# Altium PCB PCB_Final.PcbDoc
Units mm, origin at the board's own origin, x right, y up, seen from the top; angles counter-clockwise.
Board outline 62.68 x 60.32 mm, 2 copper layers (Top Layer, Bottom Layer); 43 components, 23 nets, 164 pads, 0 vias.
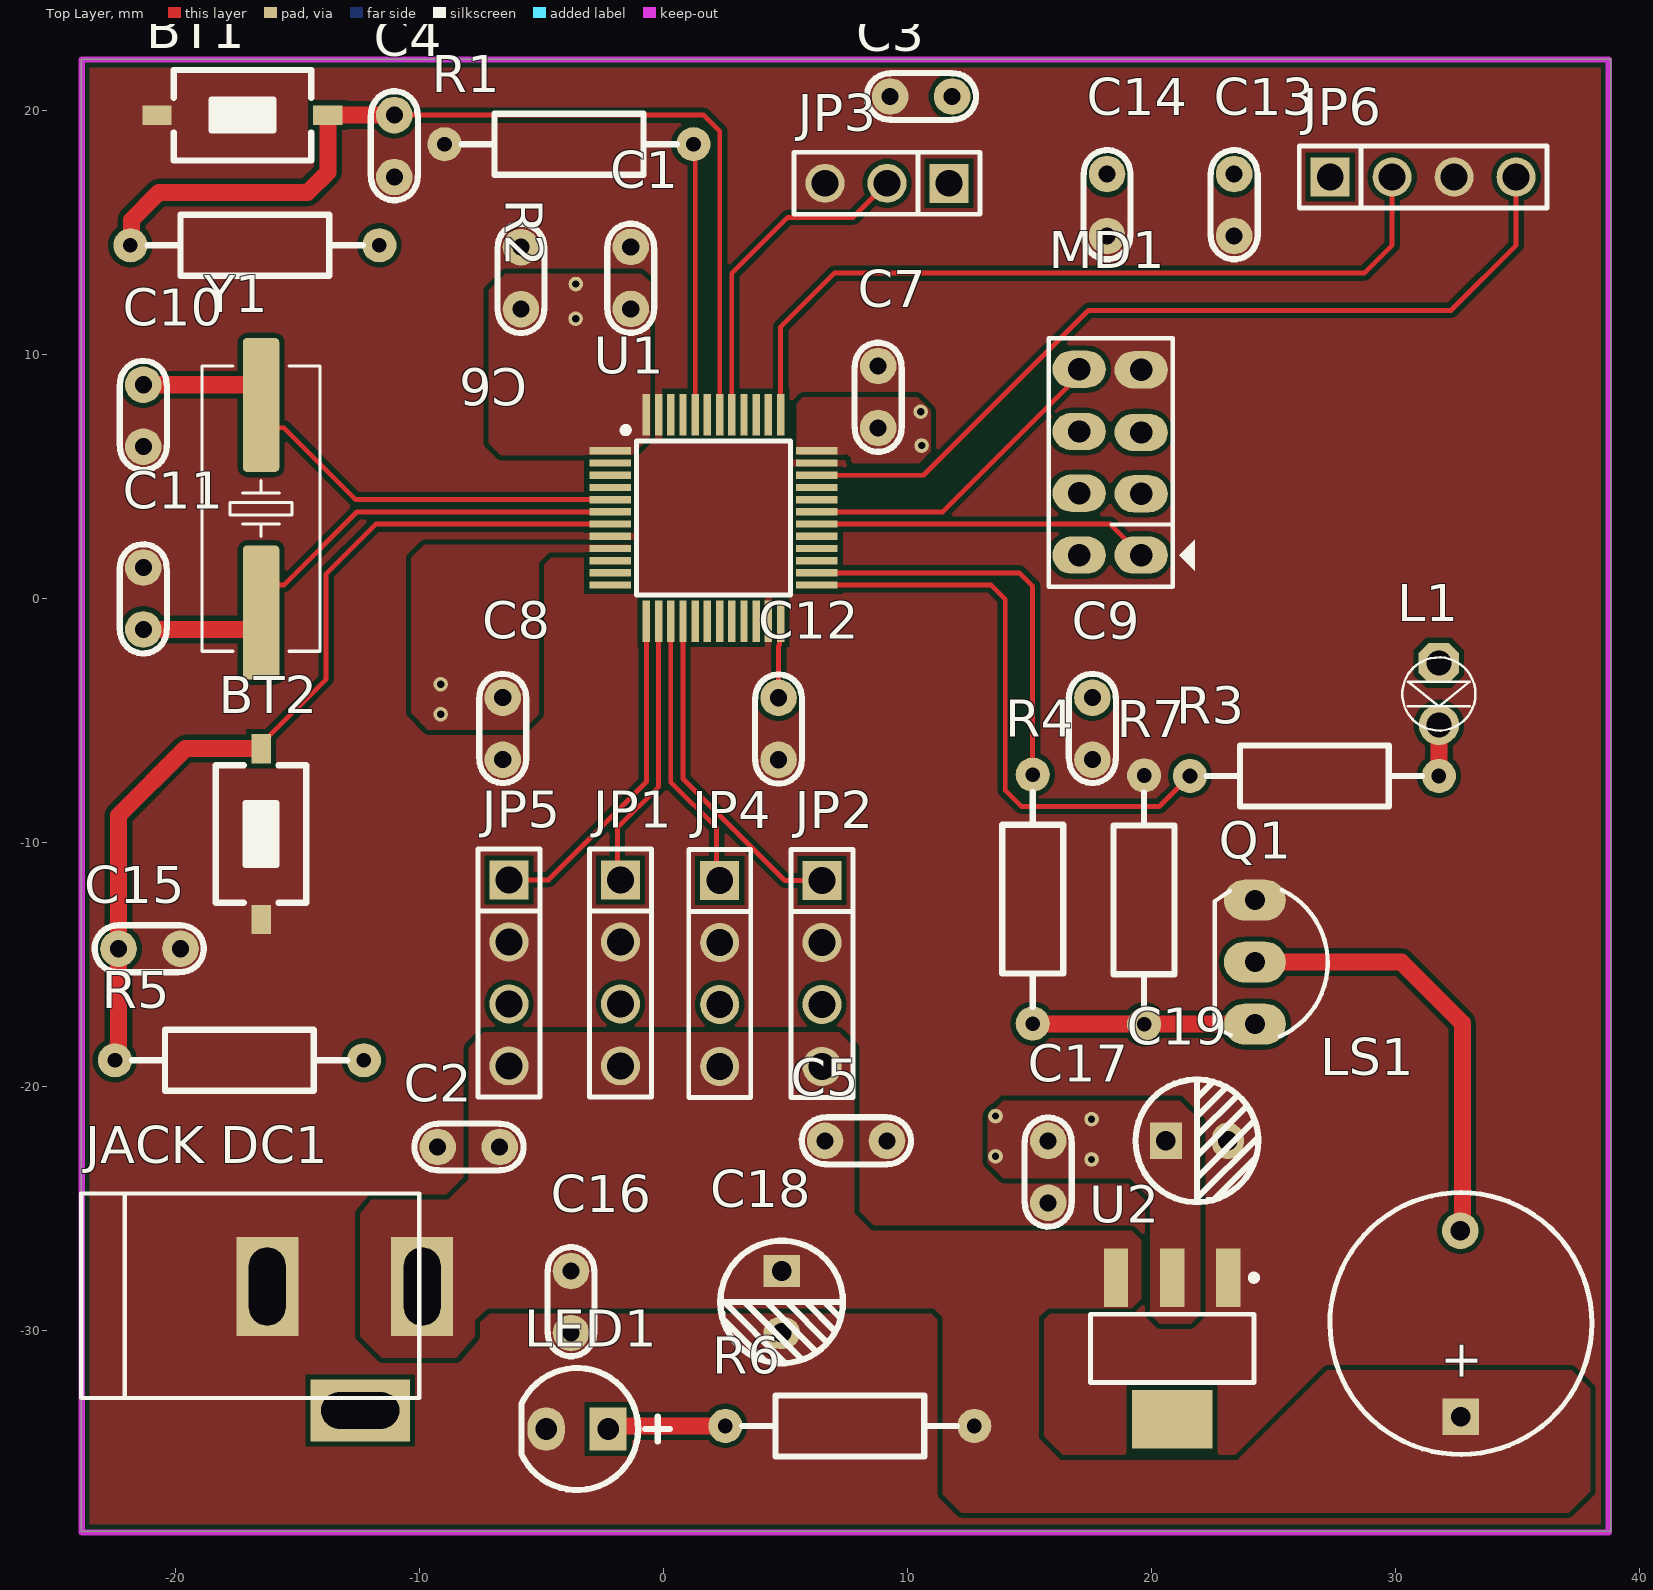
[diagram p0: Top Layer view]
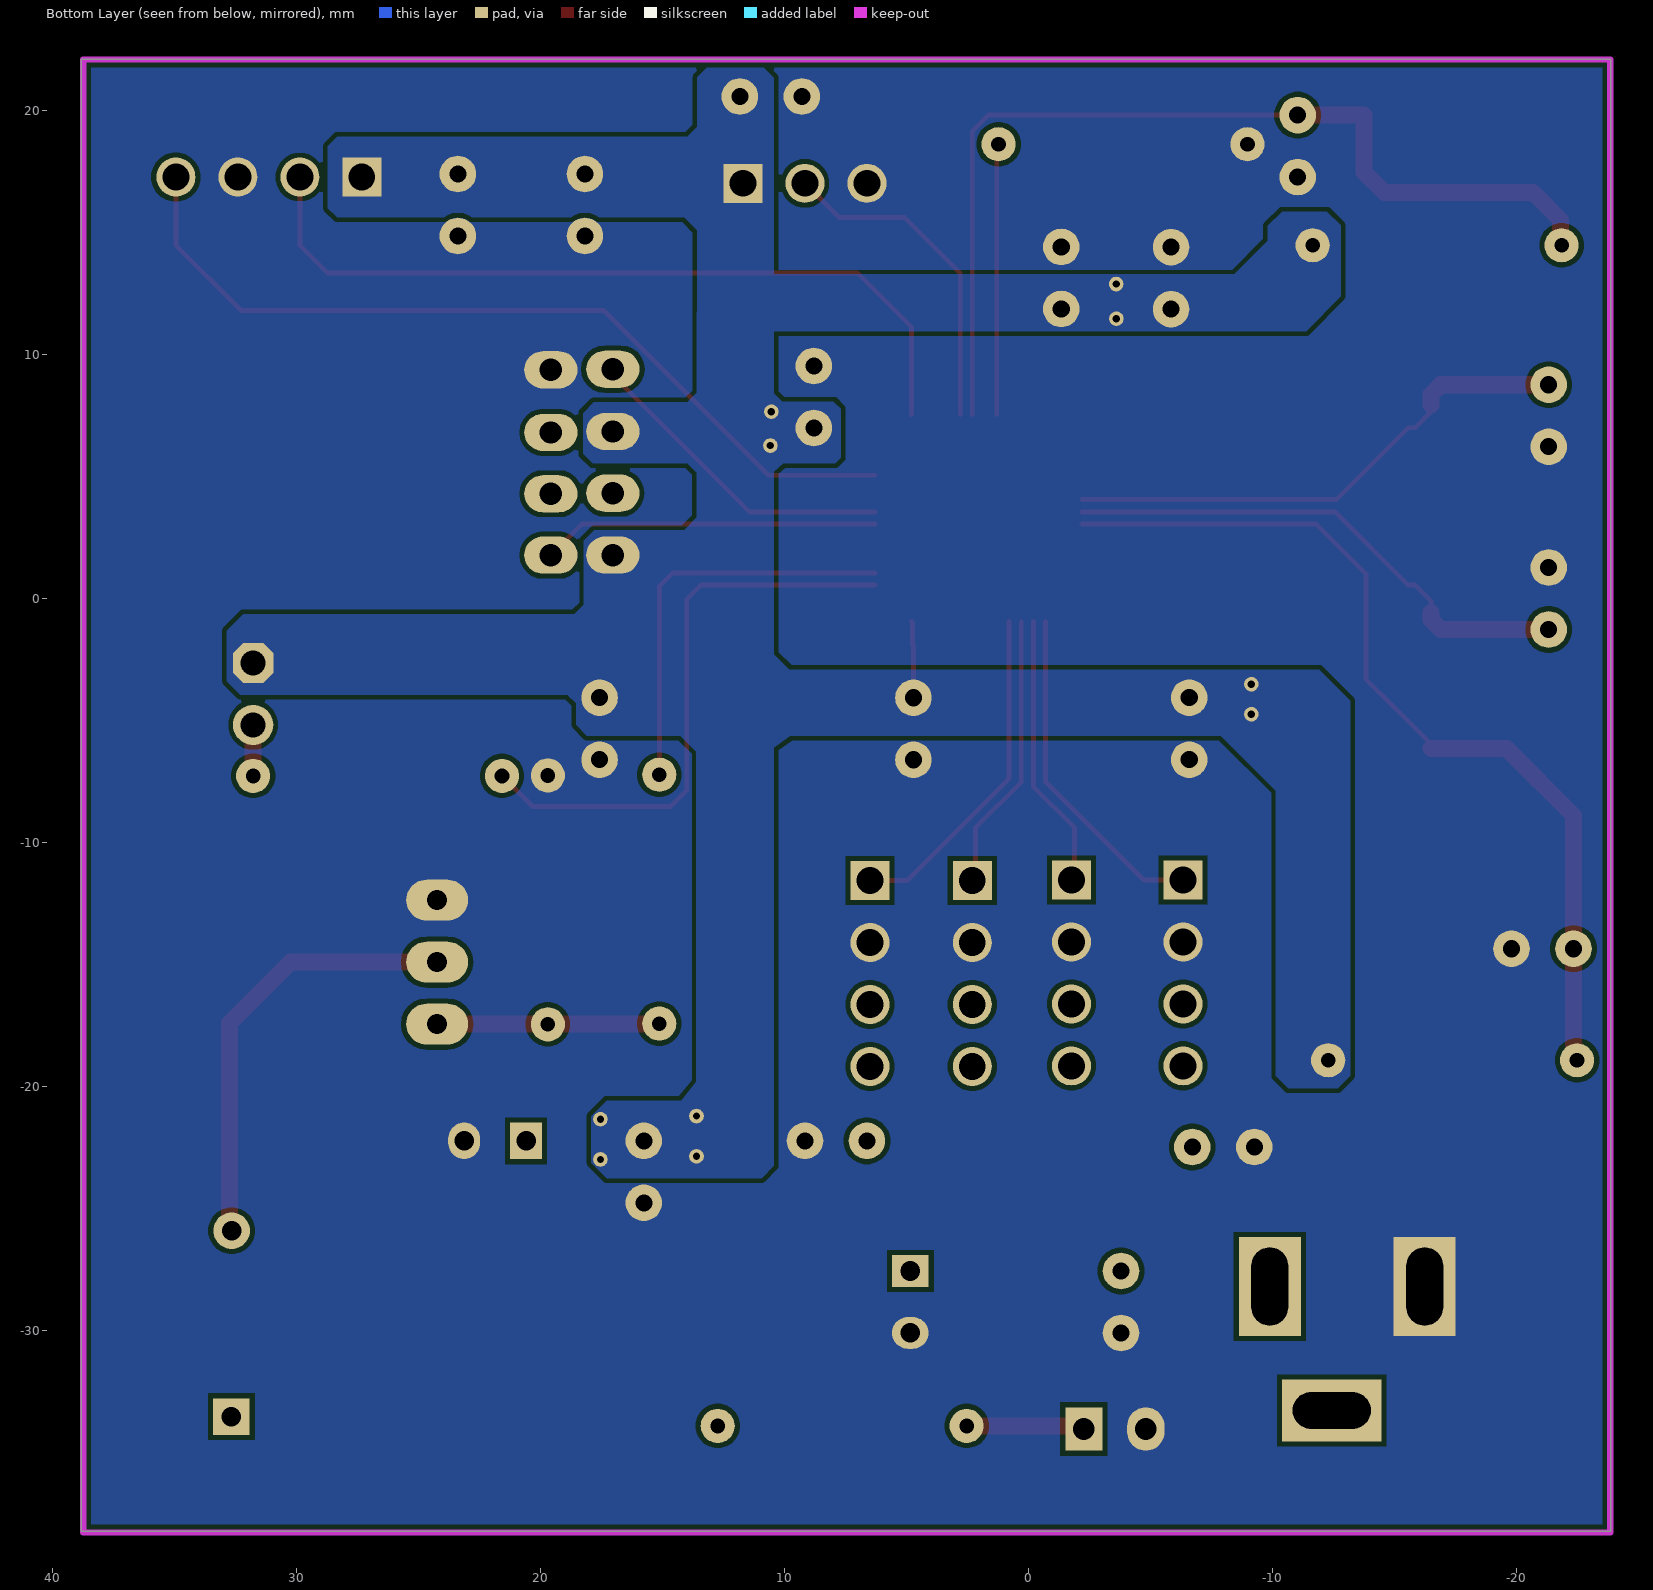
[diagram p1: Bottom Layer view, seen from below]
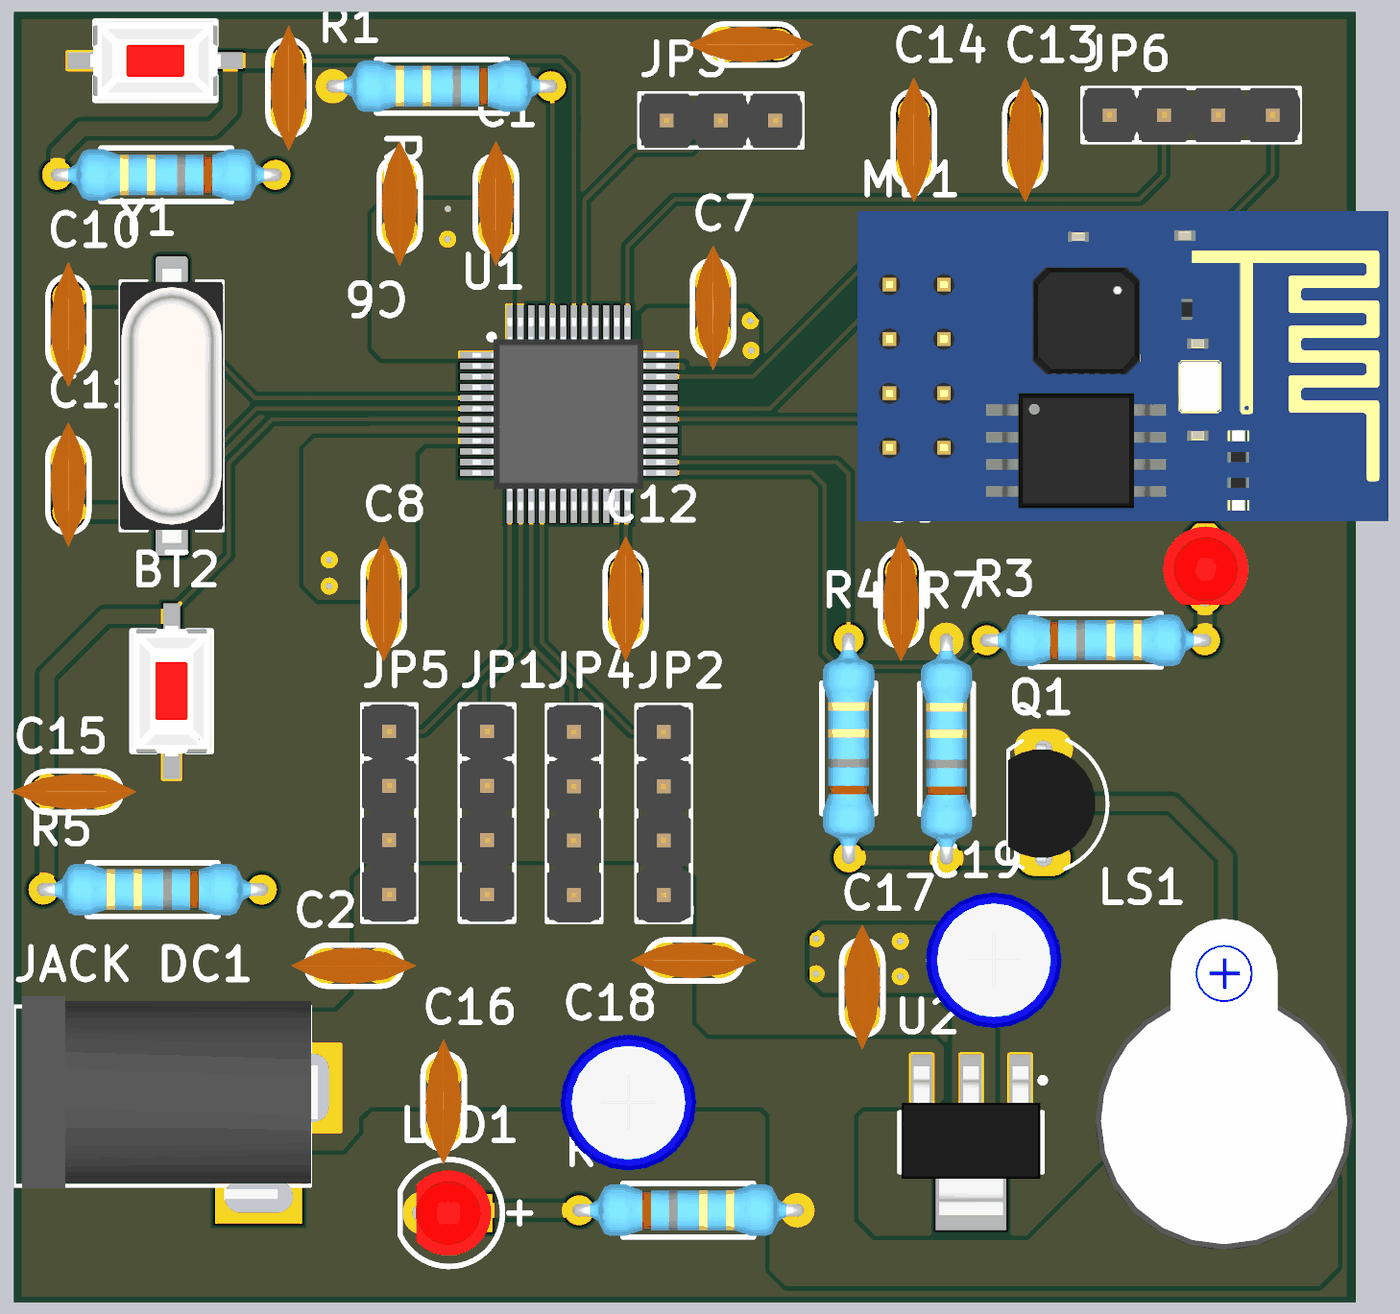
[diagram p2: 3D render of the assembled board from above, using the file's embedded part models]

## Layer stack, top to bottom
Top Solder: solder mask 0.0102, Solder Resist, Dk 3.5
Top Layer: signal copper 0.0356
Dielectric 1: dielectric 0.32, FR-4, Dk 4.8
Bottom Layer: signal copper 0.0356
Bottom Solder: solder mask 0.0102, Solder Resist, Dk 3.5

## Board outline
-23.876,-38.227 38.8,-38.227 38.8,22.098 -23.876,22.098

## Design rules (kind name [scope] priority, off if disabled: settings)
Clearance [All] p1: gap=0.2 ignorepadtopadclearanceinfootprint=FALSE
DiffPairsRouting [All] p1: maxlimit=0.254 minlimit=0.254 mostfreqgap=0.254 toplayer_minwidth=0.3 toplayer_maxwidth=0.5 toplayer_prefwidth=0.354 bottomlayer_minwidth=0.254 bottomlayer_maxwidth=0.5 bottomlayer_prefwidth=0.354 maxuncoupledlength=12.7
HoleSize [All] p1: absolutevalues=TRUE maxlimit=10 minlimit=0.3 maxpercent=80.000 minpercent=20.000
HoleToHoleClearance [All] p1: gap=0 allowstackedmicrovias=TRUE
MinimumSolderMaskSliver [All] p1: minsoldermaskwidth=0
PolygonConnect [All] p1: connectstyle=Direct reliefconductorwidth=0.254 reliefentries=4 polygonreliefangle="90 Angle" airgapwidth=0.254
RoutingVias [All] p1: holewidth=0.3 width=0.6 viastyle="Through Hole" minholewidth=0.3 minwidth=0.2 maxholewidth=0.3 maxwidth=0.3
SilkToSilkClearance [All] p1: silktosilkclearance=0
SilkToSolderMaskClearance [IsPad] p1: minsilkscreentomaskgap=0 clearancetoexposedcopper=TRUE
SolderMaskExpansion [All] p1: expansion=0.102 istentingtop=FALSE
Width [All] p1: maxlimit=1 minlimit=0.2 preferedwidth=0.7
24 further rules are at their usual default settings.

## Components (designator, comment, footprint, x,y, rotation, side; value= is the part's Value field where it differs from the comment)
BT1 "Nut Nhan 2 Chan SMD 3x6x2.5" "Nut Nhan 2 Chan SMD 3x6x2.5" -17.272,19.812 r0 top
BT2 "Nut Nhan 2 Chan SMD 3x6x2.5" "Nut Nhan 2 Chan SMD 3x6x2.5" -16.51,-9.652 r90 top
C1 "104" "tu gom" -1.36,13.14 r90 top
C2 "104" "tu gom" -8.001,-22.479 r180 top
C3 "104" "tu gom" 10.541,20.574 r180 top
C4 "104" "tu gom" -11.049,18.542 r270 top
C5 "104" "tu gom" 7.874,-22.225 r180 top
C6 "104" "tu gom" -5.86,13.13 r90 top
C7 "104" "tu gom" 8.78,8.26 r90 top
C8 "104" "tu gom" -6.604,-5.334 r270 top
C9 "104" "tu gom" 17.56,-5.334 r270 top
C10 "15pF" "tu gom" -21.336,7.493 r270 top
C11 "15pF" "tu gom" -21.336,0 r90 top
C12 "104" "tu gom" 4.699,-5.337 r90 top
C13 "104" "tu gom" 23.368,16.129 r270 top
C14 "104" "tu gom" 18.161,16.129 r270 top
C15 "104" "tu gom" -21.082,-14.351 r0 top
C16 "104" "tu gom" -3.81,-28.829 r270 top
C17 "104" "tu gom" 15.748,-23.495 r90 top
C18 "220uF" "tu hoa 5mm" 4.826,-28.829 r270 top
C19 "220uF" "tu hoa 5mm" 21.844,-22.225 r0 top
"JACK DC1" "JACK DC 5" "JACK DC 5.5" -13.081,-30.734 r0 top value="Jac DC"
JP1 "KY-026" "JP 1x4 DT" -1.778,-11.533 r270 top
JP2 "MQ-2" "JP 1x4 DT" 6.477,-11.557 r270 top
JP3 "DHT22" "JP 1x3 DT" 11.684,17.018 r180 top
JP4 "KY-026" "JP 1x4 DT" 2.286,-11.557 r270 top
JP5 "MQ-2" "JP 1x4 DT" -6.35,-11.533 r270 top
JP6 "SWD" "JP 1x4 DT" 27.305,17.272 r0 top
L1 "LED 3mm" LED-3MM-RED 31.76,-2.64 r270 top
LED1 "LED 3mm Do" "LED 3mm Do" -3.556,-34.036 r180 top
LS1 "Coi" "Coi Chip Speacker" 32.652,-33.528 r90 top
MD1 "ESP8266 Module" "ESP2866 Module" 19.558,1.778 r90 top
Q1 "C1815" TO92 24.22,-14.9 r270 top value=C9014
R1 "10k" "tro vach 1/4w" -3.89,18.62 r0 top
R2 "10k" "tro vach 1/4w" -16.764,14.478 r0 top
R3 "10k" "tro vach 1/4w" 26.66,-7.27 r180 top
R4 "1k" "tro vach 1/4w" 15.113,-12.319 r270 top
R5 "10k" "tro vach 1/4w" -17.399,-18.923 r0 top
R6 "220R" "tro vach 1/4w" 7.62,-33.909 r180 top
R7 "10k" "tro vach 1/4w" 19.68,-12.35 r270 top
U1 "STM32F103C8T6" LQFP-48_19.6_393_58X11_SMD 2.032,3.302 r0 top
U2 "LM1117-3.3V" SOT223 20.828,-30.734 r180 top
Y1 "8Mhz" "Thach Anh 2 chan SMD" -16.51,3.683 r90 top value=4Mhz

## Footprints (in the part's own frame and the unit in brackets; to place one, negate y for a bottom-side part, rotate by r counter-clockwise, add the part's x,y. Pads: shape width x height; smd on the part's side, far side on the other; paste and mask are expansions set on the pad)
"Coi Chip Speacker" [mm]
  rect 1.5x1.5 hole 0.8: 1(0,0)
  round 1.5 hole 0.8: 2(7.62,0.013)
  silkscreen extent -1.55,-5.38 9.18,5.36, body extent -2.22,-6 13.24,6, height 4.5
"ESP2866 Module" [mil]
  oval 60x86 hole 36: 1(0,0) 2(99,0) 3(198,0) 4(299,0) 5(0,100) 6(100,100) 7(199.5,100) 8(300,100)
  silkscreen extent -51,-86 350,149, body extent -137,-817 433,159, height 381
"JACK DC 5.5" [mm] "Jac DC input"
  rect 2.54x4.064 hole 1.5 slot 3.2 at 90 deg: 1(3.175,2.54) 2(-3.175,2.54)
  rect 4.064x2.54 hole 1.5 slot 3.2 at 0 deg: 3(0.635,-2.54)
  silkscreen extent -10.79,-2.03 3.05,6.35, body extent -10.42,-2.67 3.4,6.84, height 11.02
"JP 1x3 DT" [mm]
  rect 1.6x1.6 hole 1.1: 1(0,0)
  round 1.6 hole 1.1: 2(2.54,0) 3(5.08,0)
  silkscreen extent -1.27,-1.27 6.35,1.27, body extent -1.27,-1.27 6.35,1.27, height 8.54
"JP 1x4 DT" [mm] "4 pins, 1 row, straight, gold plating"
  rect 1.6x1.6 hole 1.1: 1(0,0)
  round 1.6 hole 1.1: 2(2.54,0) 3(5.08,0) 4(7.62,0)
  silkscreen extent -1.27,-1.27 8.89,1.27, body extent -1.27,-1.27 8.89,1.27, height 8.54
"LED 3mm Do" [mil] "Footprintf LED phi 3"
  rect 60x70 hole 35: 1(-50,0)
  oval 60x70 hole 35: 2(50,0)
  silkscreen extent -150,-98 90,98, body extent -77,-78 60,78, height 205
LED-3MM-RED [mil]
  oct 65x65 hole 40: 1(0,0)
  round 65 hole 40: 2(100,0)
  silkscreen extent -9,-59 109,59, body extent -27,-77 117,80, height 181
LQFP-48_19.6_393_58X11_SMD [mm] "48LQFP"
  rect 1.7x0.3 smd mask+0.076: 1(-4.238,2.75) 2(-4.238,2.25) 3(-4.238,1.75) 4(-4.238,1.25) 5(-4.238,0.75) 6(-4.238,0.25) 7(-4.238,-0.25) 8(-4.238,-0.75) 9(-4.238,-1.25) 10(-4.238,-1.75) 11(-4.238,-2.25) 12(-4.238,-2.75) 25(4.238,-2.75) 26(4.238,-2.25) 27(4.238,-1.75) 28(4.238,-1.25) 29(4.238,-0.75) 30(4.238,-0.25) 31(4.238,0.25) 32(4.238,0.75) 33(4.238,1.25) 34(4.238,1.75) 35(4.238,2.25) 36(4.238,2.75)
  rect 0.3x1.7 smd mask+0.076: 13(-2.75,-4.238) 14(-2.25,-4.238) 15(-1.75,-4.238) 16(-1.25,-4.238) 17(-0.75,-4.238) 18(-0.25,-4.238) 19(0.25,-4.238) 20(0.75,-4.238) 21(1.25,-4.238) 22(1.75,-4.238) 23(2.25,-4.238) 24(2.75,-4.238) 37(2.75,4.238) 38(2.25,4.238) 39(1.75,4.238) 40(1.25,4.238) 41(0.75,4.238) 42(0.25,4.238) 43(-0.25,4.238) 44(-0.75,4.238) 45(-1.25,4.238) 46(-1.75,4.238) 47(-2.25,4.238) 48(-2.75,4.238)
  silkscreen extent -3.72,-3.15 3.15,3.72, body extent -4.5,-4.5 4.5,4.5, height 1.7
"Nut Nhan 2 Chan SMD 3x6x2.5" [mm] "Switch SMD type"
  rect 1.2x0.8 smd: 1(-3.5,0) 2(3.5,0)
  silkscreen extent -2.82,-1.85 2.82,1.85, body extent -3.05,-1.85 3.05,1.85, height 2.5
SOT223 [mm]
  rect 1x2.4 smd: 1(-2.3,-2.9) 2(0,-2.9) 3(2.3,-2.9)
  rect 3.3x2.4 smd: 4(0,2.9)
  silkscreen extent -3.48,-3.02 3.35,1.4, body extent -3.25,-3.56 3.25,3.4, height 1.68
"Thach Anh 2 chan SMD" [mm] "SMD Crystal HC49/US-SM package"
  round 0.508 on Mech15: 0(0,0)
  rrect25% 5.5x1.5 smd: 1(-4.25,0) 2(4.25,0)
  silkscreen extent -5.84,-2.41 5.84,2.41, body extent -6.4,-2.41 6.4,2.42, height 4.29
TO92 [mil] "TO-92"
  oval 66x100 hole 32: 1(-100,0) 2(0,0) 3(100,0)
  silkscreen extent -117,-65 120,118, body extent -109,-66 109,95, height 245
"tro vach 1/4w" [mm]
  round 1.4 hole 0.6: 1(-5.1,0) 2(5.1,0)
  silkscreen extent -4.39,-1.25 4.42,1.25, body extent -5.38,-1.2 5.38,1.2, height 2.41
"tu gom" [mm] "Tu gom mini"
  round 1.5 hole 0.7: 1(-1.27,0) 2(1.27,0)
  silkscreen extent -2.25,-0.97 2.22,0.97, body extent -2.92,-0.85 2.92,0.85, height 6.12
"tu hoa 5mm" [mm]
  rect 1.3x1.5 hole 0.8: 1(-1.27,0)
  oval 1.3x1.5 hole 0.8: 2(1.27,0)
  silkscreen extent -2.51,-2.51 2.51,2.51, body extent -3.12,-3.18 3.23,3.18, height 14.55

## Part data
C1 C2 C3 C4 C5 C6 C7 C8 C9 C12 C13 C14 C15 C16 C17: library part "Tu gom 104 50V", "Cắm", Chung_Loai=Cắm, Don_Vi=Con, Ma_Hang=MH004761, So_Chan=2, Ten_Linh_Kien="Tụ gốm 104 100nF 50V"
C10 C11: library part "Tu gom 15pF 50V", "Cắm", Chung_Loai=Cắm, Don_Vi=Con, Ma_Hang=MH004767, So_Chan=2, Ten_Linh_Kien="Tụ gốm 15P 50V"
C18 C19: library part "Tu Hoa 220uF 10V 6x11", "Cắm", Chung_Loai=Cắm, Don_Vi=Con, Ma_Hang=MH004510, So_Chan=2, Ten_Linh_Kien="Tụ Hóa 220uF 10V 6x11MM"
"JACK DC1": library part "JACK DC 5.5", "JACK DC 5.5"
JP1 JP2 JP4 JP5 JP6: library part "JP 1x4 2.54 Duc Thang", "Cắm", Chung_Loai=Cắm, Don_Vi=Con, Ma_Hang=MH000903, Ten_Linh_Kien="Jump Đơn Đực 2.54MM 1x40P Thẳng 11MM"
JP3: library part "JP 1x3 2.54 Duc Thang", "Cắm", Chung_Loai=Cắm, Don_Vi=Con, Ma_Hang=MH000903, Ten_Linh_Kien="Jump Đơn Đực 2.54MM 1x40P Thẳng 11MM"
L1: library part "LED 3mm Do", "Cắm", Chung_Loai=Cắm, Don_Vi=Con, Ma_Hang=MH003892, Ten_Linh_Kien="Led 3MM Phủ Đỏ (10c)"
LED1: "Cắm", Chung_Loai=Cắm, Don_Vi=Con, Ma_Hang=MH004931, Ten_Linh_Kien="LED 3MM Sáng Đỏ ( SS)"
LS1: library part "Coi Chip Speaker", "Còi chip"
Q1: "NPN transistor"
R1 R2 R3 R5 R7: library part "Tro Vach 1/4W 1% 10k", "Cắm", Chung_Loai=Cắm, Don_Vi=Con, Ma_Hang=MH006349, So_Chan=2, Ten_Linh_Kien="Trở Vạch 1/4w 1% 10k"
R4: library part "Tro Vach 1/4W 5% 1k", "Cắm", Chung_Loai=Cắm, Don_Vi=Con, Ma_Hang=MH007390, So_Chan=2, Ten_Linh_Kien="Trở Vạch 1/4w 5% 1k"
R6: library part "Tro Vach 1/4W 5% 220R", "Cắm", Chung_Loai=Cắm, Don_Vi=Con, Ma_Hang=MH007300, So_Chan=2, Ten_Linh_Kien="Trở Vạch 1/4w 5% 220R"
U1: library part IC_STM32F103C8T6, "ARM® Cortex®-M3 STM32F1 Microcontroller IC 32-Bit 72MHz 64KB (64K x 8) FLASH 48-LQFP (7x7)", Alternate Part Number-1=NA, Case/Package=LQFP48, Manufacturer=STMicroelectronics, Manufacturer Part Number=STM32F103C8T6, Supplier Part Number-1=STM32F103C8T6, Supplier-1=LCSC
U2: library part LM1117, "800mA Low-Dropout Linear Regulator", Creator="Nguyen Ba Bien", Website=http://group3i.net
Y1: library part "Thach Anh 2 chan SMD", "Crystal For all Crystal 2pin."
BT1 BT2: Ma_Hang=MH001036, Ten="Nút Nhấn 2 Chân 3x6x2.5MM SMD"

## Free pads (board coordinates)
  round 0.6 hole 0.3: 2(17.526,-21.336) 3(17.526,-22.987) 4(13.589,-21.209) 5(13.589,-22.86) 6(10.52,7.66) 7(10.56,6.27) 9(-3.62,11.47) 10(-9.15,-3.51) 11(-9.15,-4.74)
  round 0.6 hole 0.3 mask+0.102: 8(-3.61,12.89)

## Nets (pads, with @x,y where several pads share a name; then routed paths per layer and width w, separated by ;. In a path a pad name is that pad's centre, name@x,y a point inside that pad or via, vN(x,y) a via of type N, cw(c..) or ccw(c..) an arc to the next point about the centre after c; other vN are vias at no path point)
3.3V: C1.1 C3.1 C6.1 C7.1 C8.1 C9.1 C12.2 C13.1 C14.1 C17.2 C19.1 JP3.1 JP6.1 L1.1 MD1.5 MD1.7 pad.2 pad.3 pad.4 pad.5 pad.6 pad.7 pad.8 pad.9 pad.10 pad.11 R2.2 R5.2 U1.1 U1.9 U1.24 U1.36 U1.48 U2.2 | length 3.1
  Top Layer w0.2: C12.2@4.699,-3.937 4.699,-1.943 4.732,-1.91 4.732,-0.986 U1.24
  Top Layer w1: R5.2@-12.192,-18.903 R5.2@-12.172,-18.923
5V: "JACK DC1.1" C2.1 C5.2 C16.1 C18.1 JP1.4 JP2.4 JP4.4 JP5.4 LS1.1 R6.1 U2.3
BOOT0: R1.2 U1.44 | length 11.1
  Top Layer w0.2: R1.2 1.282,18.548 U1.44
GND: "JACK DC1.2" BT1.1 BT2.1 C1.2 C2.2 C3.2 C4.2 C5.1 C6.2 C7.2 C8.2 C9.2 C10.2 C11.2 C12.1 C13.2 C14.2 C15.2 C16.2 C17.1 C18.2 C19.2 JP1.2 JP2.2 JP3.3 JP4.2 JP5.2 JP6.3 LED1.2 MD1.4 Q1.1 R1.1 R7.1 U1.8 U1.23 U1.35 U1.47 U2.1
NetL1_2: L1.2 R3.1 | length 2.1
  Top Layer w0.7: R3.1 L1.2
NetLED1_1: LED1.1 R6.2 | length 4.9
  Top Layer w0.7: LED1.1 -2.159,-33.909 R6.2
NetLS1_2: LS1.2 Q1.2 | length 18.1
  Top Layer w0.7: Q1.2 30.22,-14.9 32.72,-17.4 32.72,-25.827 LS1.2
NetQ1_3: Q1.3 R4.2 R7.2 | length 9.1
  Top Layer w0.7: R4.2 15.128,-17.434 19.664,-17.434 R7.2 19.685,-17.445 24.215,-17.445 Q1.3
OSC_IN: C10.1 U1.5 Y1.2 | length 21.5
  Top Layer w0.2: Y1.2 -16.51,7.643 -15.867,7 -15.577,7 -12.629,4.052 U1.5
  Top Layer w0.7: C10.1 -16.91,8.763 -16.51,8.363 Y1.2
OSC_OUT: C11.1 U1.6 Y1.1 | length 21.6
  Top Layer w0.2: Y1.1 -16.51,-0.091 -15.867,0.552 -15.577,0.552 -12.577,3.552 U1.6
  Top Layer w0.7: C11.1 -16.91,-1.27 -16.51,-0.87 Y1.1
PA3: JP5.1 U1.13 | length 13.9
  Top Layer w0.2: JP5.1 -4.733,-11.533 -0.718,-7.518 U1.13
PA4: JP1.1 U1.14 | length 11.3
  Top Layer w0.2: JP1.1@-1.905,-11.533 -1.905,-9.398 -0.218,-7.711 U1.14
PA5: JP4.1 U1.15 | length 11.4
  Top Layer w0.2: U1.15 0.282,-7.521 2.159,-9.398 JP4.1@2.159,-11.557
PA6: JP2.1 U1.16 | length 13.9
  Top Layer w0.2: U1.16 0.782,-7.382 4.957,-11.557 JP2.1
PB5: JP3.2 U1.41 | length 13.7
  Top Layer w0.2: U1.41 2.782,13.323 5.08,15.621 7.747,15.621 JP3.2
PB6: BT1.2 C4.1 R2.1 U1.42 | length 40.2
  Top Layer w0.2: C4.1 1.628,19.812 2.286,19.154 2.286,17.309 2.29,17.305 2.29,16.477 2.286,16.473 2.286,7.544 U1.42
  Top Layer w0.7: R2.1 -21.825,14.517 -21.825,15.513 -20.701,16.637 -14.605,16.637 -13.772,17.47 BT1.2 C4.1
PB12: R3.2 U1.25 | length 24.2
  Top Layer w0.2: U1.25 6.278,0.56 13.4,0.56 13.99,-0.03 13.99,-7.86 14.65,-8.52 20.31,-8.52 R3.2
PB13: R4.1 U1.26 | length 16.8
  Top Layer w0.2: U1.26 14.569,1.052 15.113,0.508 R4.1
RESET: BT2.2 C15.1 R5.1 U1.7 | length 37.8
  Top Layer w0.2: BT2.2 -16.51,-5.952 -15.035,-4.477 -15.018,-4.477 -13.843,-3.302 -13.843,1.016 -11.811,3.048 -7.31,3.048 -7.306,3.052 U1.7
  Top Layer w0.7: R5.1 -22.365,-18.789 -22.365,-18.294 -22.352,-18.281 C15.1 -22.352,-8.89 -19.614,-6.152 BT2.2
RX: MD1.1 U1.30 | length 13.8
  Top Layer w0.2: U1.30 18.284,3.052 MD1.1
SWDCLK: JP6.2 U1.37 | length 32.8
  Top Layer w0.2: U1.37 4.782,11.132 6.985,13.335 28.702,13.335 29.845,14.478 JP6.2
SWDIO: JP6.4 U1.34 | length 35.4
  Top Layer w0.2: U1.34 10.64,5.052 15.494,9.906 ; 15.495,9.906 17.4,11.811 32.258,11.811 34.925,14.478 JP6.4
TX: MD1.8 U1.31 | length 13.1
  Top Layer w0.2: U1.31 11.426,3.552 MD1.8@17.018,9.144
pads on no net: "JACK DC1.3" JP1.3 JP2.3 JP4.3 JP5.3 MD1.2 MD1.3 MD1.6 U1.2 U1.3 U1.4 U1.10 U1.11 U1.12 U1.17 U1.18 U1.19 U1.20 U1.21 U1.22 U1.27 U1.28 U1.29 U1.32 U1.33 U1.38 U1.39 U1.40 U1.43 U1.45 U1.46 U2.4 Y1.0

## Polygon pours and split planes (outlines as drawn)
GND on Top Layer "GND_L01_P035" (solid, remove dead copper, pour order 35): -23.86,-38.28 -23.86,22.09 38.72,22.09 38.72,-38.28
3.3V on Top Layer "3.3V_L01_P034" (solid, remove dead copper, pour order 34): -1.36,2.2 -9.83,2.2 -10.36,1.67 -10.36,-4.69 -9.67,-5.38 -5.76,-5.38 -5.13,-4.75 -5.13,1.47 -4.7,1.9 -1.372,1.9
3.3V on Top Layer "3.3V_L01_P033" (solid, remove dead copper, pour order 33): -0.57,6.7 -0.57,12.96 -0.92,13.31 -6.51,13.31 -7.18,12.64 -7.18,6.37 -6.69,5.88 -1.32,5.88 -0.569,6.631
3.3V on Top Layer "3.3V_L01_P030" (solid, remove dead copper, pour order 30): 10.396,8.244 10.93,7.71 10.93,6.029 10.458,5.54 7.75,5.54 7.67,5.612 7.67,5.76 7.53,5.9 5.55,5.9 5.44,6.01 5.44,7.99 5.694,8.244
5V on Top Layer "Top Layer-5V" (solid, remove dead copper, pour order 23): -12.444,-30.228 -11.557,-31.115 -8.509,-31.115 -7.753,-30.235 -7.753,-29.578 -7.219,-29.083 11.049,-29.083 11.43,-29.464 11.43,-34.544 11.43,-34.925 11.43,-36.703 12.192,-37.465 37.084,-37.465 37.973,-36.576 37.973,-32.385 37.211,-31.623 27.178,-31.623 23.495,-35.306 15.494,-35.306 16.256,-35.306 15.367,-34.417 15.367,-29.464 15.748,-29.083 19.177,-29.083 19.558,-28.702 19.558,-26.289 19.177,-25.908 8.508,-25.908 7.8,-25.2 7.8,-18.4 7.18,-17.78 -7.38,-17.78 -8,-18.4 -8,-23.8 -8.838,-24.638 -11.989,-24.638 -12.444,-25.207
3.3V on Top Layer "Top Layer-3.3V" (solid, remove dead copper, pour order 12): 13.271,-23.114 13.906,-23.749 19.113,-23.749 19.939,-24.575 19.939,-29.337 20.32,-29.718 21.592,-29.718 21.971,-29.339 21.971,-26.416 21.971,-22.733 21.971,-21.399 21.145,-20.574 13.906,-20.574 13.271,-21.209
GND on Bottom Layer "GND_L02_P036" (solid, remove dead copper, pour order 36): -23.86,-38.28 -23.86,22.09 38.72,22.09 38.72,-38.28
3.3V on Bottom Layer "Bottom Layer-3.3V" (solid, remove dead copper, pour order 32): 18.88,-3.94 32.28,-3.94 32.84,-3.38 32.84,-1.32 32.17,-0.65 18.59,-0.65 18.2,-0.26 18.2,2.37 17.77,2.8 14.1,2.8 13.576,3.324 13.574,5.154 13.96,5.54 17.84,5.54 18.24,5.94 18.24,7.59 17.79,8.04 13.96,8.04 13.569,8.431 13.561,15.085 14.097,15.621 28.321,15.621 28.702,16.002 28.702,18.542 28.321,18.923 13.97,18.923 13.555,19.338 13.552,21.373 13.165,21.76 10.838,21.76 10.414,21.336 10.414,13.28 -8.454,13.28 -9.83,14.656 -9.83,15.28 -10.41,15.86 -12.25,15.86 -12.82,15.29 -12.82,12.38 -11.4,10.96 7.69,10.96 10.414,10.96 10.414,8.414 10.075,8.075 7.975,8.075 7.67,7.77 7.67,5.77 7.9,5.54 10.03,5.54 10.414,5.197 10.414,-2.286 9.779,-2.921 -6.985,-2.921 -7.62,-2.921 -11.938,-2.921 -13.208,-4.191 -13.208,-19.558 -12.7,-20.066 -10.668,-20.066 -10.16,-19.558 -10.16,-7.874 -7.906,-5.62 9.739,-5.62 10.414,-6.119 10.414,-23.241 10.922,-23.749 17.272,-23.749 17.907,-23.114 17.907,-21.209 17.272,-20.574 14.224,-20.574 13.589,-19.812 13.589,-6.281 14.25,-5.62 18.08,-5.62 18.52,-5.18 18.52,-4.3

## Keep-outs
Keep-Out Layer:
  lines w0.254: -23.86,-38.28 -23.86,22.09 38.72,22.09 38.72,-38.28 -23.86,-38.28

## Text inside footprints (layer, text, board x,y; h text height)
LS1: Top Overlay "+" at 33.363,-32.118 h1.52 r90